# Altium PCB MainPCB.PcbDoc
Units mm, origin at the board's own origin, x right, y up, seen from the top; angles counter-clockwise.
Board outline 43.3 x 84.9 mm, 2 copper layers (Top Layer, Bottom Layer); 5 components, 10 nets, 100 pads, 0 vias.
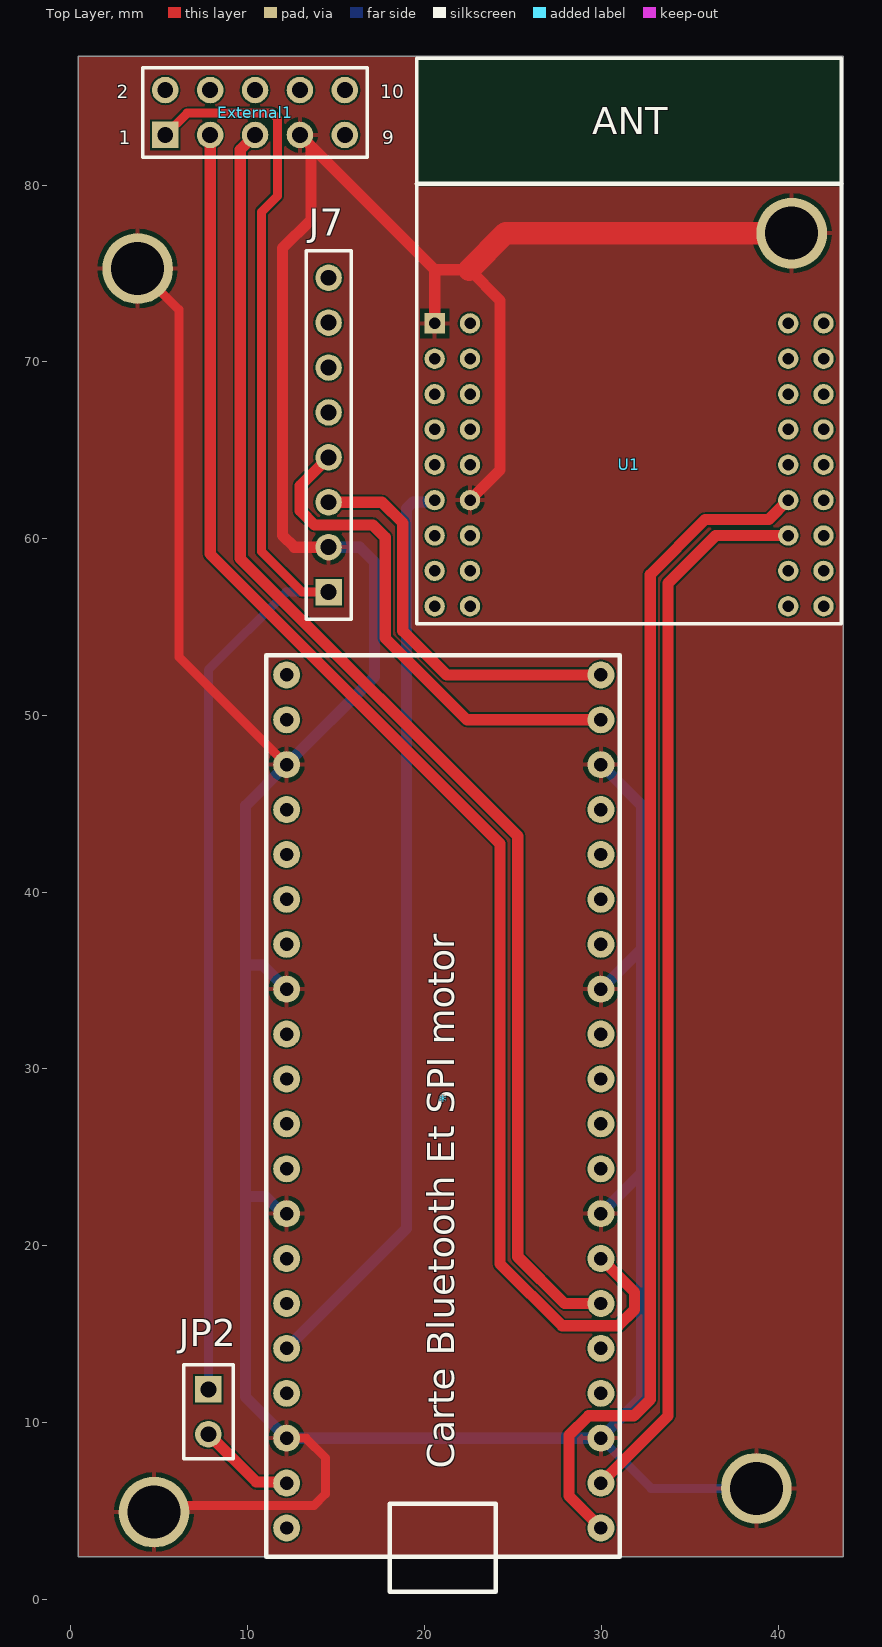
[diagram p0: Top Layer view]
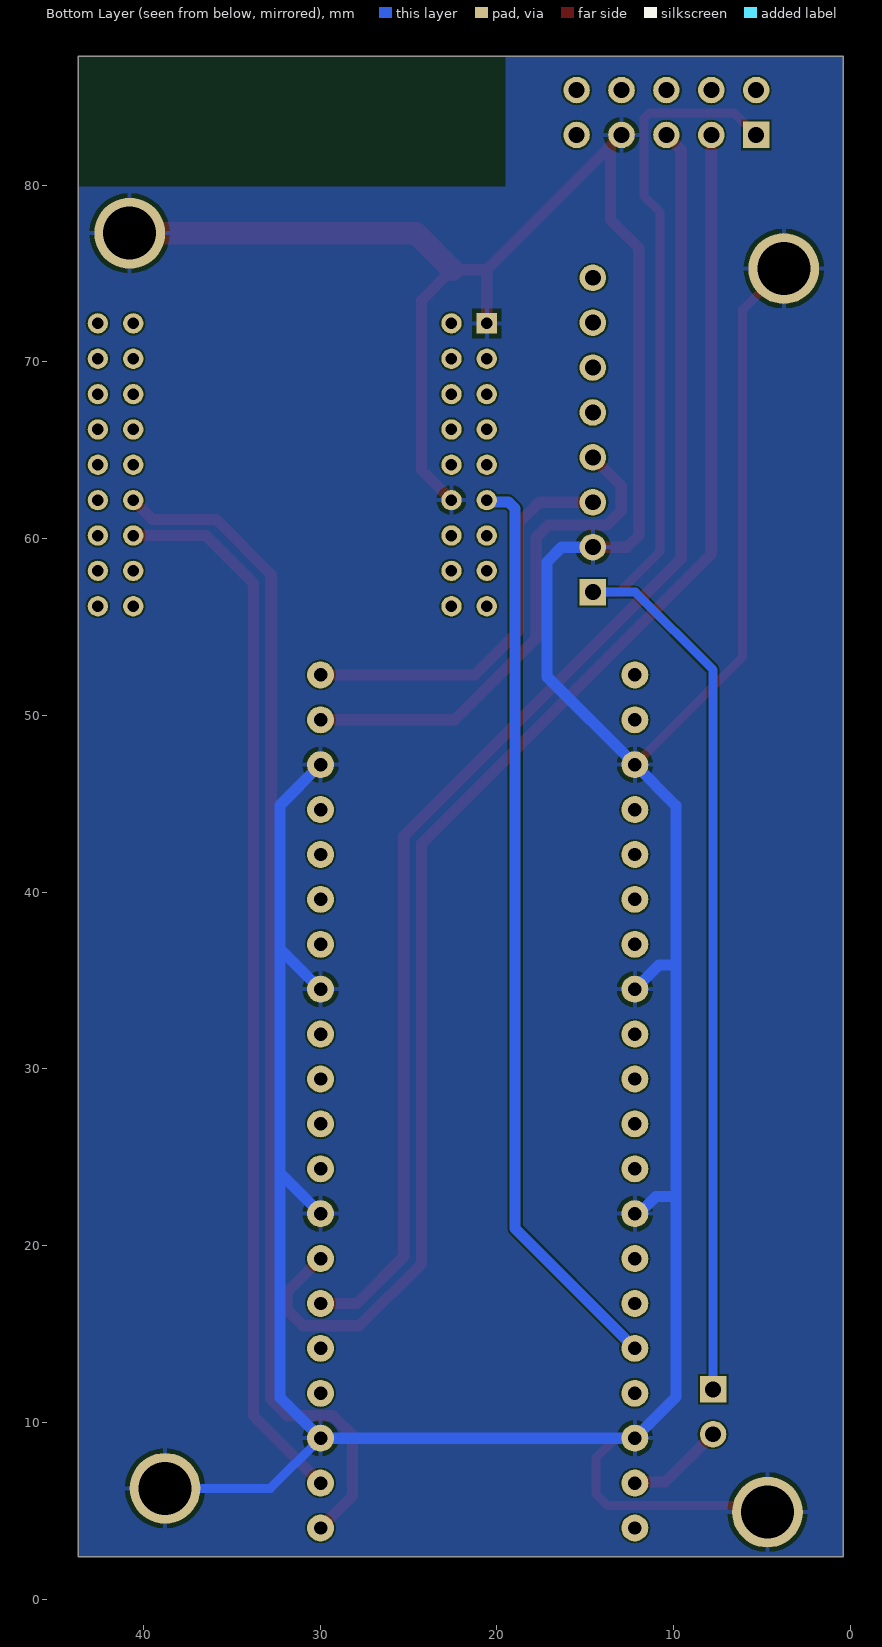
[diagram p1: Bottom Layer view, seen from below]

## Layer stack, top to bottom
Top Solder: solder mask 0.0102, Solder Resist, Dk 3.5
Top Layer: signal copper 0.0356
Dielectric 1: dielectric 0.32, FR-4, Dk 4.8
Bottom Layer: signal copper 0.0356
Bottom Solder: solder mask 0.0102, Solder Resist, Dk 3.5

## Board outline
0.4,2.4 0.4,87.3 43.7,87.3 43.7,2.4

## Design rules (kind name [scope] priority, off if disabled: settings)
Clearance [All] p1: gap=0.102 ignorepadtopadclearanceinfootprint=FALSE
HoleSize [All] p1: absolutevalues=TRUE maxlimit=10 minlimit=0.025 maxpercent=80.000 minpercent=20.000
MinimumSolderMaskSliver [All] p1: minsoldermaskwidth=0.1
PlaneClearance [All] p1: clearance=1.016
PolygonConnect [All] p1: connectstyle=Relief reliefconductorwidth=0.254 reliefentries=4 polygonreliefangle="90 Angle" airgapwidth=0.254
RoutingVias [All] p1: holewidth=0.381 width=0.762 viastyle="Through Hole" minholewidth=0.381 minwidth=0.762 maxholewidth=0.635 maxwidth=1.27
SilkToSolderMaskClearance [IsPad] p1: minsilkscreentomaskgap=0.1 clearancetoexposedcopper=TRUE
SolderMaskExpansion [All] p1: expansion=0.102
Width [All] p1: maxlimit=1.27 minlimit=0.254 preferedwidth=0.254
26 further rules are at their usual default settings.

## Classes and differential pairs
component class Raspberry: External1 J7 JP2 U1

## Components (designator, comment, footprint, x,y, rotation, side; value= is the part's Value field where it differs from the comment)
* "Raspberry Pico" "Raspberry Pico" 2.04,-3.59 r0 top
External1 "BARRETTE_5 CONTACTS_2 RANGEES_MALE_DROITE" BARRETTE_5X2_M_D 5.335,82.835 r0 top
J7 "BARRETTE_8 CONTACTS_1 RANGEE_FEMELLE_DROITE" BARRETTE_8_F_D 14.575,56.975 r90 top
JP2 "JUMPER2" BARRETTE_2_M_D 7.775,11.875 r270 top
U1 "MOD51822" MOD51822 19.575,55.175 r0 top

## Footprints (in the part's own frame and the unit in brackets; to place one, negate y for a bottom-side part, rotate by r counter-clockwise, add the part's x,y. Pads: shape width x height; smd on the part's side, far side on the other; paste and mask are expansions set on the pad)
BARRETTE_2_M_D [mm] "BARRETTE 2 CONTACTS ; 1 RANGEE ; DROITE ; MALE ; ESPACEMENT BROCHES = 2.54 mm"
  rect 1.5x1.5 hole 0.9: 1(0,0)
  round 1.5 hole 0.9: 2(2.54,0)
  silkscreen extent -1.4,-1.4 3.94,1.4, body extent -1.3,-1.2 3.78,1.3, height 8.55
BARRETTE_5X2_M_D [mm] "BARRETTE 5 CONTACTS ; 2 RANGEES ; DROITE ; MALE ; ESPACEMENT BROCHES = 2.54 mm"
  rect 1.5x1.5 hole 0.9: 1(0,0)
  round 1.5 hole 0.9: 2(0,2.54) 3(2.54,0) 4(2.54,2.54) 5(5.08,0) 6(5.08,2.54) 7(7.62,0) 8(7.62,2.54) 9(10.16,0) 10(10.16,2.54)
  silkscreen extent -1.27,-1.27 11.43,3.81, body extent -1.3,-1.24 11.4,3.84, height 10.67
BARRETTE_8_F_D [mm] "BARRETTE 8 CONTACTS ; 1 RANGEE ; DROITE ; FEMELLE ; ESPACEMENT BROCHES = 2.54 mm"
  rect 1.5x1.5 hole 0.9: 1(0,0)
  round 1.5 hole 0.9: 2(2.54,0) 3(5.08,0) 4(7.62,0) 5(10.16,0) 6(12.7,0) 7(15.24,0) 8(17.78,0)
  silkscreen extent -1.53,-1.27 19.3,1.27, body extent -1.53,-1.21 19.3,1.2, height 8.5
MOD51822 [mm]
  rect 1.15x1.15 hole 0.65: 1(1,17)
  round 1.15 hole 0.65: 2(3,17) 3(1,15) 4(3,15) 5(1,13) 6(3,13) 7(1,11) 8(3,11) 9(1,9) 10(3,9) 11(1,7) 12(3,7) 13(1,5) 14(3,5) 15(1,3) 16(3,3) 17(1,1) 18(3,1) 19(21,1) 20(23,1) 21(21,3) 22(23,3) 23(21,5) 24(23,5) 25(21,7) 26(23,7) 27(21,9) 28(23,9) 29(21,11) 30(23,11) 31(21,13) 32(23,13) 33(21,15) 34(23,15) 35(21,17) 36(23,17)
  silkscreen extent 0,0 24,32
"Raspberry Pico" [mil]
  round 60 hole 30: 1(1100,300) 2(1100,400) 3(1100,500) 4(1100,600) 5(1100,700) 6(1100,800) 7(1100,900) 8(1100,1000) 9(1100,1100) 10(1100,1200) 11(1100,1300) 12(1100,1400) 13(1100,1500) 14(1100,1600) 15(1100,1700) 16(1100,1800) 17(1100,1900) 18(1100,2000) 19(1100,2100) 20(1100,2200) 21(400,2200) 22(400,2100) 23(400,2000) 24(400,1900) 25(400,1800) 26(400,1700) 27(400,1600) 28(400,1500) 29(400,1400) 30(400,1300) 31(400,1200) 32(400,1100) 33(400,1000) 34(400,900) 35(400,800) 36(400,700) 37(400,600) 38(400,500) 39(400,400) 40(400,300)
  silkscreen extent 354,157 1142,2244

## Part data
External1: "BARRETTE 5 CONTACTS 2 RANGEES MALE DROITE", Type=M_D_5X2
JP2: "BARRETTE 2 CONTACTS 1 RANGEE MALE DROITE", Type=JUMPER2
J7: Type=Gyro

## Free pads (board coordinates)
  round 4 hole 3: 2(3.775,75.275) 2(4.7,4.925) 2(38.775,6.275) 2(40.775,77.275)

## Nets (pads, with @x,y where several pads share a name; then routed paths per layer and width w, separated by ;. In a path a pad name is that pad's centre, name@x,y a point inside that pad or via, vN(x,y) a via of type N, cw(c..) or ccw(c..) an arc to the next point about the centre after c; other vN are vias at no path point)
+3.3: *.36 U1.11 | length 52.1
  Bottom Layer w0.635: *.36 18.975,20.965 18.975,61.704 19.347,62.076 20.476,62.076 U1.11
+5: External1.1 J7.1 JP2.1 | length 85.9
  Top Layer w0.508: External1.1 6.575,84.075 11.375,84.075 11.675,83.775 11.675,79.375 10.775,78.475 10.775,59.275 13.063,56.987 14.563,56.987 J7.1
  Bottom Layer w0.508: JP2.1 7.775,52.575 12.175,56.975 J7.1
GND: *.3 *.8 *.13 *.18 *.23 *.28 *.33 *.38 External1.7 J7.2 pad.2 U1.1 U1.12 | length 257.6
  Top Layer w0.508: pad.2@3.775,75.275 6.1,72.95 6.1,53.31 *.23 ; pad.2@4.7,4.925 5.075,5.3 13.74,5.3 14.4,5.96 14.4,8 13.29,9.11 *.38
  Top Layer w0.635: External1.7 13.575,82.215 ; J7.2 12.635,59.515 11.975,60.175 11.975,76.435 13.575,78.035 13.575,82.215 ; U1.1 20.575,75.215 ; U1.12 24.275,63.875 24.275,73.475 22.535,75.215 20.575,75.215 ; 13.575,82.215 20.575,75.215
  Top Layer w1.27: 22.535,75.215 24.595,77.275 pad.2@40.775,77.275
  Bottom Layer w0.508: *.3 32.815,6.275 pad.2@38.775,6.275
  Bottom Layer w0.635: *.33 11.959,21.81 10.994,22.775 9.875,22.775 ; *.28 10.835,35.875 9.875,35.875 ; J7.2 16.335,59.515 17.175,58.675 17.175,52.185 *.23 9.875,44.885 9.875,35.875 ; *.8 32.275,24.105 ; *.13 30.01,34.51 32.275,36.775 ; *.18 32.275,44.915 32.275,36.775 ; 9.875,22.775 9.875,35.875 ; 9.875,22.775 9.875,11.435 *.38 *.3 32.275,11.405 32.275,24.105 ; 32.275,24.105 32.275,36.775
Net*_39: *.39 JP2.2 | length 5.6
  Top Layer w0.635: JP2.2 10.485,6.624 12.145,6.624 *.39
RX_BLE: *.1 U1.25 | length 67.6
  Top Layer w0.635: *.1 28.175,5.835 28.175,9.275 29.275,10.375 31.838,10.375 32.775,11.312 32.775,57.975 35.875,61.075 39.475,61.075 U1.25
SCL_E: *.7 External1.3 | length 83.8
  Top Layer w0.635: External1.3 7.875,59.138 24.275,42.738 24.275,18.975 27.775,15.475 30.975,15.475 31.875,16.375 31.875,17.375 *.7
SCL_G: *.20 J7.3 | length 23
  Top Layer w0.635: J7.3 17.595,62.055 18.775,60.875 18.775,54.775 21.26,52.29 *.20
SDA_E: *.6 External1.5 | length 76.1
  Top Layer w0.635: External1.5 9.575,81.995 9.575,58.875 25.275,43.175 25.275,19.375 27.92,16.73 *.6
SDA_G: *.19 J7.4 | length 28.9
  Top Layer w0.635: J7.4 12.975,62.995 12.975,61.575 13.775,60.775 17.075,60.775 17.775,60.075 17.775,54.375 22.4,49.75 *.19
TX_BLE: *.2 U1.23 | length 60.4
  Top Layer w0.635: *.2 33.775,10.365 33.775,57.475 36.475,60.175 U1.23
pads on no net: *.4 *.5 *.9 *.10 *.11 *.12 *.14 *.15 *.16 *.17 *.21 *.22 *.24 *.25 *.26 *.27 *.29 *.30 *.31 *.32 *.34 *.35 *.37 *.40 External1.2 External1.4 External1.6 External1.8 External1.9 External1.10 J7.5 J7.6 J7.7 J7.8 U1.2 U1.3 U1.4 U1.5 U1.6 U1.7 U1.8 U1.9 U1.10 U1.13 U1.14 U1.15 U1.16 U1.17 U1.18 U1.19 U1.20 U1.21 U1.22 U1.24 U1.26 U1.27 U1.28 U1.29 U1.30 U1.31 U1.32 U1.33 U1.34 U1.35 U1.36

## Polygon pours and split planes (outlines as drawn)
GND on Top Layer "Top Layer-GND" (solid, pour order 0): 0.4,87.3 19.5,87.3 19.5,79.9 43.7,79.9 43.7,2.4 0.4,2.4
GND on Bottom Layer "Bottom Layer-GND" (solid, pour order 2): 0.4,87.3 19.5,87.3 19.5,79.9 43.7,79.9 43.7,2.4 0.4,2.4

## Silkscreen, mask and mechanical layers (free items; w line width, h text height)
Top Overlay:
  text "Carte Bluetooth Et SPI motor" at 21.675,7.375 h1.52 r90
Mechanical 1:
  the board outline again, w0.254

## Text inside footprints (layer, text, board x,y; h text height)
External1: Top Overlay "10" at 17.5,84.9 h0.76; Top Overlay "9" at 17.6,82.3 h0.76; Top Overlay "1" at 2.7,82.3 h0.76; Top Overlay "2" at 2.6,84.9 h0.76
U1: Top Overlay "ANT" at 29.481,82.861 h1.52